# Altium PCB PCB1.PcbDoc
Units mm, origin at the board's own origin, x right, y up, seen from the top; angles counter-clockwise.
Board outline 105.28 x 80.03 mm, 2 copper layers (Top Layer, Bottom Layer); 35 components, 35 nets, 96 pads, 0 vias.
Unrouted connection lines stored in the file: 40.
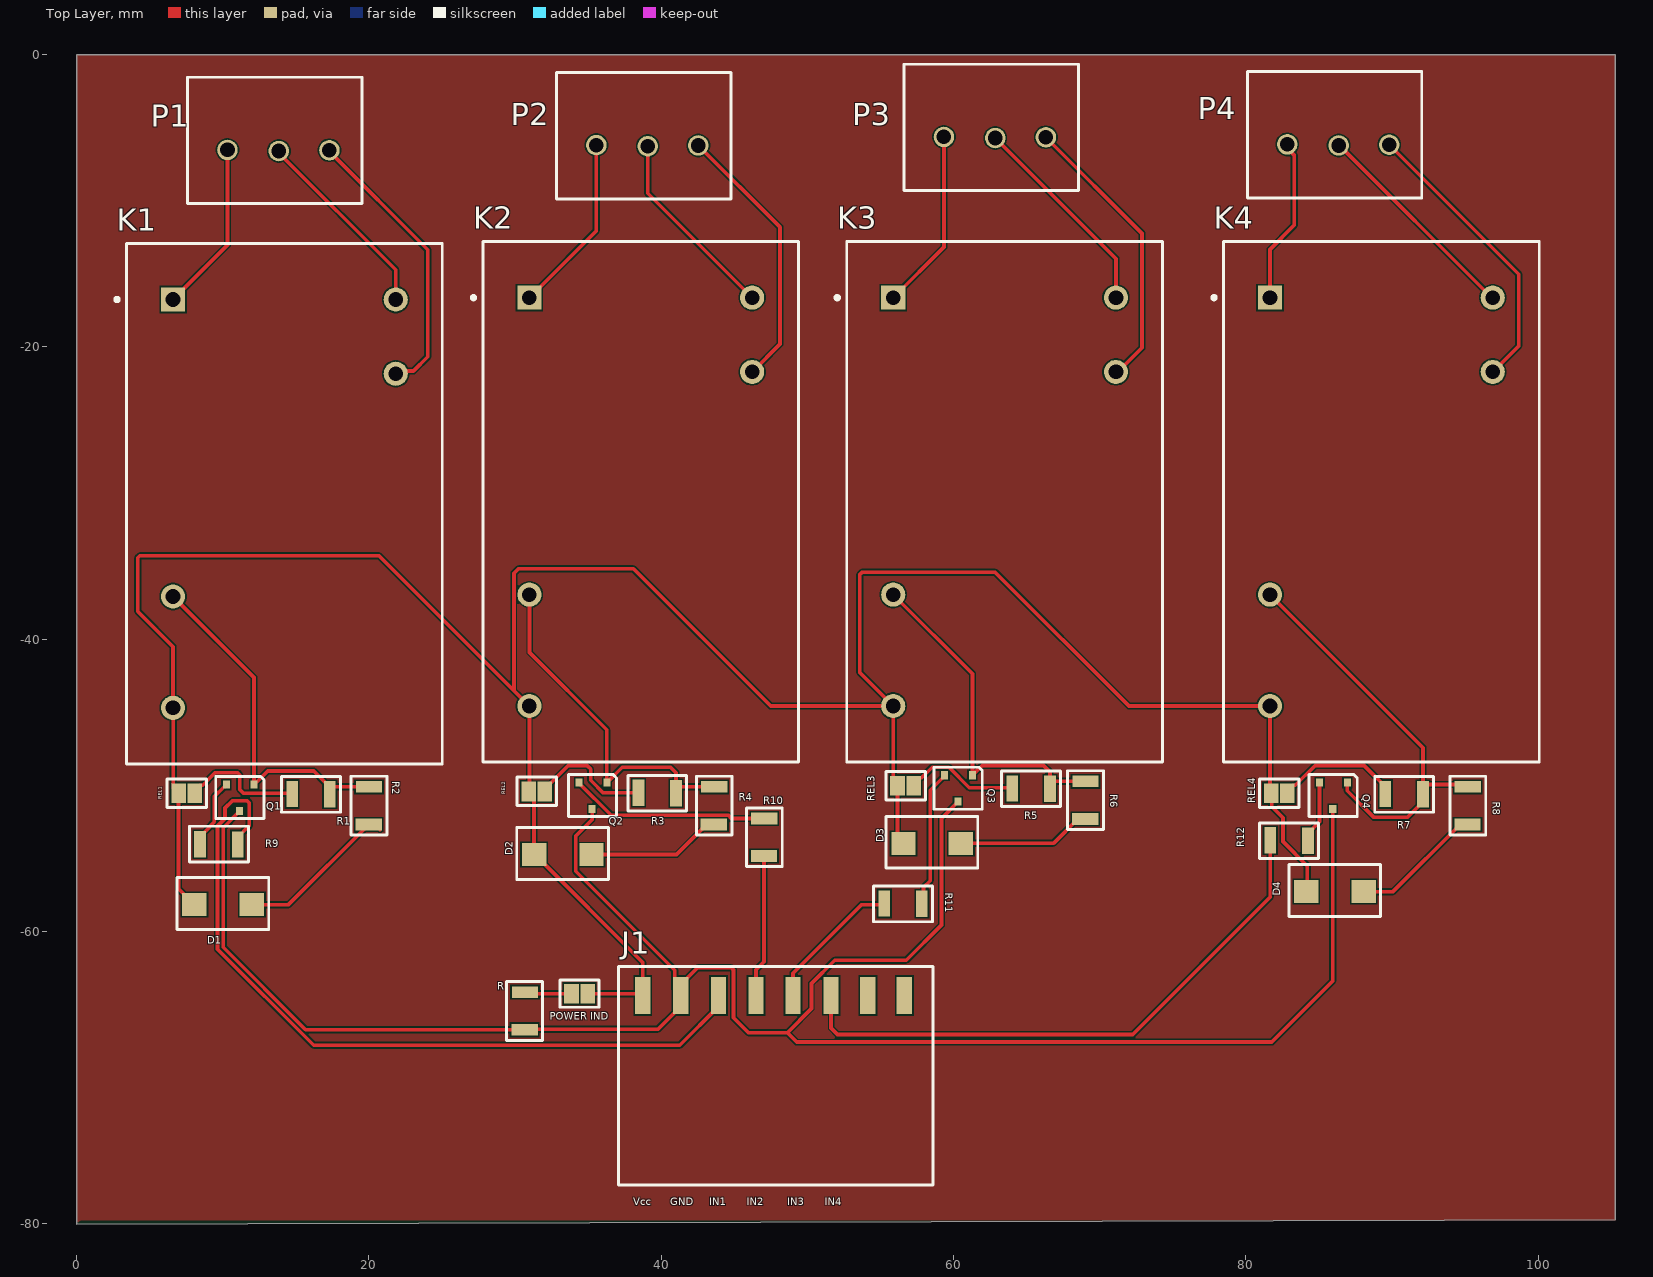
[diagram p0: Top Layer view]
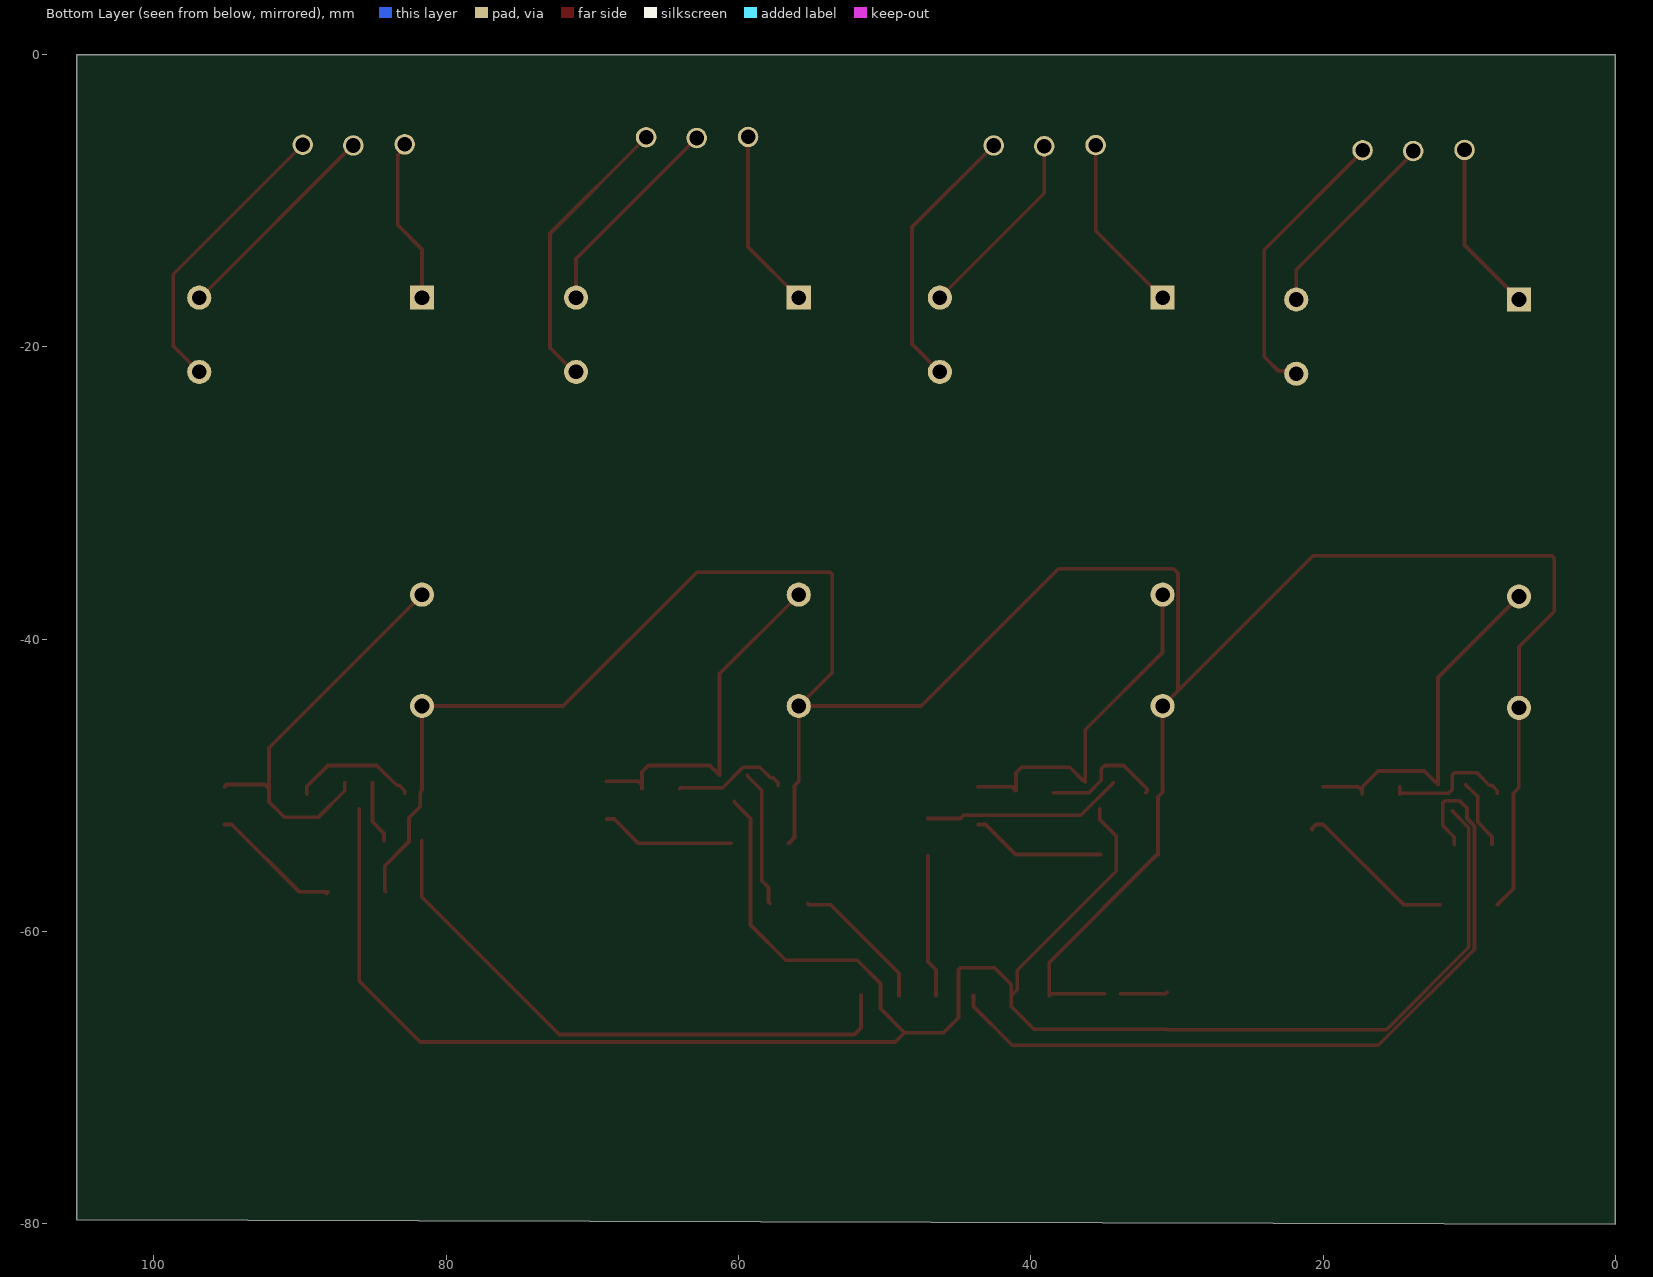
[diagram p1: Bottom Layer view, seen from below]
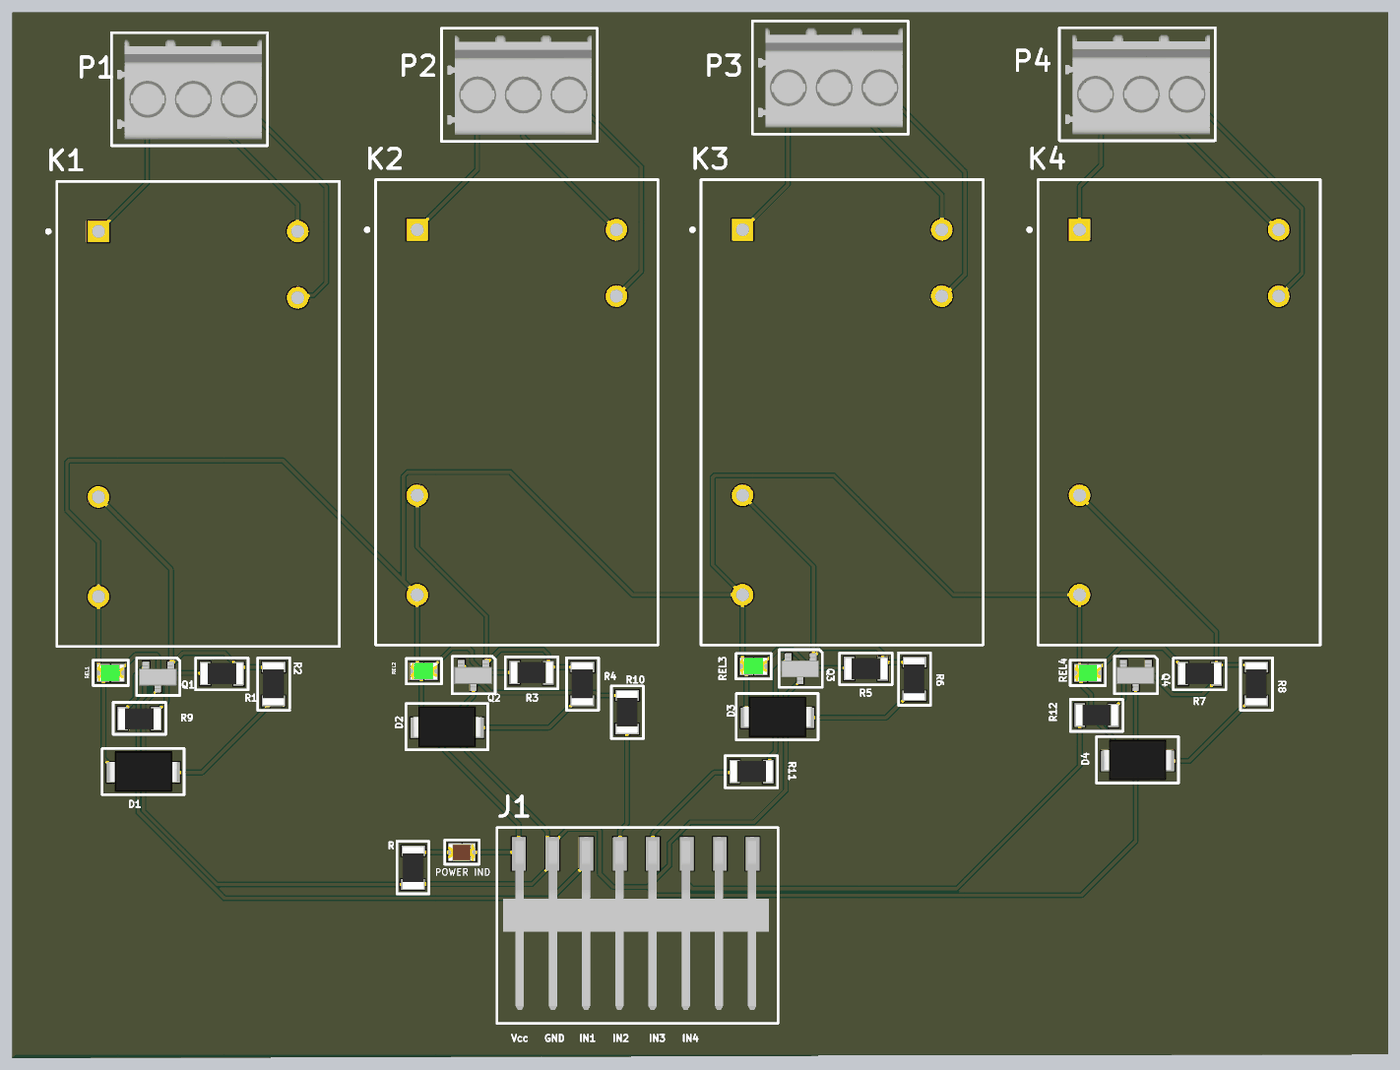
[diagram p2: 3D render of the assembled board from above, using the file's embedded part models]

## Layer stack, top to bottom
Top Solder: solder mask 0.0102, Solder Resist, Dk 3.5
Top Layer: signal copper 0.0356
Dielectric 1: dielectric 0.32, FR-4, Dk 4.8
Bottom Layer: signal copper 0.0356
Bottom Solder: solder mask 0.0102, Solder Resist, Dk 3.5

## Board outline
105.283,0 105.283,-79.738 0,-80.026 0,0

## Design rules (kind name [scope] priority, off if disabled: settings)
Clearance [All] p1: gap=0.1 ignorepadtopadclearanceinfootprint=FALSE
PolygonConnect [All] p1: connectstyle=Relief reliefconductorwidth=0.254 reliefentries=4 polygonreliefangle="90 Angle" airgapwidth=0.254
RoutingVias [All] p1: holewidth=0.711 width=1.27 viastyle="Through Hole" minholewidth=0.711 minwidth=1.27 maxholewidth=0.711 maxwidth=1.27
SolderMaskExpansion [All] p1: expansion=0.102 istentingtop=FALSE
Width [All] p1: maxlimit=0.254 minlimit=0.254 preferedwidth=0.254
30 further rules are at their usual default settings.

## Components (designator, comment, footprint, x,y, rotation, side; value= is the part's Value field where it differs from the comment)
D1 "Diode" Diode-1N4007 10.033,-58.166 r180 top
D2 "Diode" Diode-1N4007 33.274,-54.737 r180 top
D3 "Diode" Diode-1N4007 58.547,-53.975 r180 top
D4 "Diode" Diode-1N4007 86.106,-57.277 r180 top
J1 "6X1 header" "6X1 pin header - duplicate" 51.697,-64.389 r270 top
K1 "Relay" MODULE5B 14.224,-30.734 r270 top
K2 "Relay" MODULE5B 38.608,-30.607 r270 top
K3 "Relay" MODULE5B 63.5,-30.607 r270 top
K4 "Relay" MODULE5B 89.281,-30.607 r270 top
P1 "through hole screw terminal" "3X1 screw terminal" 11.303,-6.604 r90 top
P2 "through hole screw terminal" "3X1 screw terminal" 36.545,-6.273 r90 top
P3 "through hole screw terminal" "3X1 screw terminal" 60.325,-5.715 r90 top
P4 "through hole screw terminal" "3X1 screw terminal" 83.82,-6.223 r90 top
"POWER IND" "LED_RED_SMD" "LSM0805 Series green" 34.417,-64.262 r180 top
Q1 "Q1" "transistor BC547 RCC1206 e3" 11.176,-50.8 r270 top
Q2 "Q2" "transistor BC547 RCC1206 e3" 35.306,-50.673 r270 top
Q3 "Q1" "transistor BC547 RCC1206 e3" 60.325,-50.165 r270 top
Q4 "Q1" "transistor BC547 RCC1206 e3" 85.979,-50.673 r270 top
R "resistor" "Resistor-RCC1206 e3" 30.734,-65.405 r270 top
R1 "resistor" "Resistor-RCC1206 e3" 16.002,-50.546 r0 top
R2 "resistor" "Resistor-RCC1206 e3" 19.939,-51.435 r90 top
R3 "resistor" "Resistor-RCC1206 e3" 39.696,-50.471 r0 top
R4 "resistor" "Resistor-RCC1206 e3" 43.561,-51.435 r90 top
R5 "resistor" "Resistor-RCC1206 e3" 65.278,-50.165 r0 top
R6 "resistor" "Resistor-RCC1206 e3" 68.961,-51.054 r90 top
R7 "resistor" "Resistor-RCC1206 e3" 90.805,-50.546 r0 top
R8 "resistor" "Resistor-RCC1206 e3" 95.123,-51.435 r90 top
R9 "resistor" "Resistor-RCC1206 e3" 9.779,-54.102 r180 top
R10 "resistor" "Resistor-RCC1206 e3" 46.99,-53.594 r90 top
R11 "resistor" "Resistor-RCC1206 e3" 56.515,-58.039 r0 top
R12 "resistor" "Resistor-RCC1206 e3" 82.931,-53.721 r0 top
REL1 "LED_GREEN_SMD" LSM0805452V-Green 7.535,-50.546 r0 top
REL2 "LED_GREEN_SMD" LSM0805452V-Green 31.496,-50.419 r0 top
REL3 "LED_GREEN_SMD" LSM0805452V-Green 56.727,-50.038 r0 top
REL4 "LED_GREEN_SMD" LSM0805452V-Green 82.296,-50.546 r0 top

## Footprints (in the part's own frame and the unit in brackets; to place one, negate y for a bottom-side part, rotate by r counter-clockwise, add the part's x,y. Pads: shape width x height; smd on the part's side, far side on the other; paste and mask are expansions set on the pad)
"3X1 screw terminal" [mm]
  round 1.4 hole 1: 1(0.075,0.975) 2(0,-2.54) 3(0.05,-6)
  silkscreen extent -3.6,-8.23 5.05,3.7, body extent -3.1,-7.81 4.5,3.26, height 9.01
"6X1 pin header - duplicate" [mm]
  rect 2.55x1.05 smd: 1(0,4.95) 2(0,2.45) 3(0,-0.075) 4(0,-2.675) 5(0,-5.2) 6(0,-7.77) 7(0,-10.36) 8(0,-12.95)
  silkscreen extent -2,-14.6 12.98,6.9, body extent -1.29,-14.14 11.95,6.18, height 3.47
Diode-1N4007 [mm]
  rect 1.67x1.56 smd: A(-1.965,0) K(1.965,0)
  silkscreen extent -3.12,-1.85 3.15,1.7, body extent -2.65,-1.63 2.65,1.48, height 2.41
"LSM0805 Series green" [mm]
  rect 1x1.35 smd: A(-0.55,0) K(0.55,0)
  silkscreen extent -1.33,-0.92 1.33,0.93, body extent -0.97,-0.6 1.02,0.65, height 1.11
LSM0805452V-Green [mm]
  rect 1x1.35 smd: A(-0.55,0) K(0.55,0)
  silkscreen extent -1.35,-0.97 1.35,0.97, body extent -1,-0.62 1,0.62, height 1.11
MODULE5B [mm] "DIP; 5 Round Pins; Row Space 15.24 mm; Pitch 2.54 mm"
  rect 1.65x1.65 hole 1: 1(-13.97,-7.62)
  round 1.65 hole 1: 2(-13.97,7.62) 3(-8.89,7.62) 4(13.97,-7.62) 5(6.35,-7.62)
  silkscreen extent -17.8,-11.57 17.8,10.8, body extent -17.8,-10.8 17.8,10.8, height 14
"Resistor-RCC1206 e3" [mm]
  rect 0.8x1.8 smd: 1(-1.25,-0.05) 2(1.325,-0.075)
  silkscreen extent -1.98,-1.3 2.05,1.15, body extent -1.55,-0.85 1.65,0.75, height 0.56
"transistor BC547 RCC1206 e3" [mm]
  rect 0.55x0.48 smd: 1(-0.85,0.975) 2(-0.85,-0.925) 3(0.95,-0.025)
  silkscreen extent -1.4,-1.65 1.48,1.65, body extent -1.09,-1.5 1.24,1.42, height 0.94

## Part data
K1 K2 K3 K4: "SPDT Relay", LatestRevisionDate=17-Jul-2002, LatestRevisionNote="Re-released for DXP Platform.", PackageReference=MODULE5B, Published=8-Jun-2000, Publisher="Altium Limited"
Q1 Q2 Q3 Q4: library part BC547_SMD

## Nets (pads, with @x,y where several pads share a name; then routed paths per layer and width w, separated by ;. In a path a pad name is that pad's centre, name@x,y a point inside that pad or via, vN(x,y) a via of type N, cw(c..) or ccw(c..) an arc to the next point about the centre after c; other vN are vias at no path point)
5V: "POWER IND.A" D1.K D2.K D3.K D4.K J1.8 K1.4 K2.4 K3.4 K4.4 REL1.A REL2.A REL3.A REL4.A | length 186.7
  Top Layer w0.254: D1.K 6.985,-57.083 REL1.A 6.612,-50.173 6.612,-44.712 K1.4 6.604,-40.515 4.191,-38.102 4.191,-34.439 4.34,-34.29 20.701,-34.29 29.936,-43.525 ; 34.967,-64.262 38.62,-64.262 J1.8 38.747,-62.12 31.364,-54.737 D2.K 31.309,-50.782 REL2.A 30.988,-50.377 K2.4 29.936,-43.525 ; D3.K 56.177,-53.57 REL3.A 55.88,-49.741 K3.4 ; D4.K 84.201,-57.217 84.201,-55.499 82.55,-53.848 82.55,-52.217 81.786,-51.453 81.786,-50.586 REL4.A 81.746,-50.371 81.661,-50.286 K4.4 72.011,-44.577 62.867,-35.433 53.743,-35.433 53.594,-35.582 53.594,-42.291 K3.4 ; 29.936,-43.525 29.936,-35.491 30.248,-35.179 38.102,-35.179 47.5,-44.577 K3.4
GND: J1.7 Q1.3 Q2.3 Q3.3 Q4.3 R.2 | length 147.9
  Top Layer w0.254: Q1.3 11.151,-51.785 10.033,-52.903 10.033,-61.087 15.676,-66.73 R.2 30.687,-66.702 39.774,-66.702 41.337,-65.139 J1.7 ; Q2.3 35.281,-52.349 34.163,-53.467 34.163,-55.88 40.939,-62.656 40.939,-63.991 J1.7 ; Q3.3 60.3,-51.15 59.182,-52.268 59.182,-59.563 56.769,-61.976 51.879,-61.976 50.292,-63.563 50.292,-65.278 48.641,-66.929 ; Q4.3 85.954,-63.398 81.788,-67.564 49.276,-67.564 48.641,-66.929 ; J1.7 41.337,-63.639 42.492,-62.484 44.809,-62.484 44.958,-62.633 44.958,-65.913 45.974,-66.929 48.641,-66.929
IN1: J1.6 R9.1 | length 53.8
  Top Layer w0.254: R9.1 11.029,-53.552 11.811,-52.77 11.811,-51.203 11.662,-51.054 10.668,-51.054 10.16,-51.562 10.16,-52.275 9.652,-52.783 9.652,-61.214 16.229,-67.791 41.275,-67.791 43.927,-65.139 J1.6
IN2: J1.5 R10.1 | length 9.8
  Top Layer w0.254: J1.5 46.497,-62.624 47.04,-62.081 R10.1
IN3: J1.4 R11.1 | length 9.7
  Top Layer w0.254: J1.4 49.022,-62.865 53.721,-58.166 55.188,-58.166 R11.1
IN4: J1.3 R12.1 | length 40.2
  Top Layer w0.254: J1.3 51.622,-66.615 52.063,-67.056 72.263,-67.056 81.681,-57.638 R12.1
NetD1_A: D1.A R2.1 | length 11.2
  Top Layer w0.254: D1.A 14.508,-58.166 R2.1 20.489,-52.685 20.762,-52.958 R2.1@20.762,-53.025
NetD2_A: D2.A R4.1 | length 9.2
  Top Layer w0.254: D2.A 41.059,-54.737 43.111,-52.685 R4.1
NetD3_A: D3.A R6.1 | length 9.2
  Top Layer w0.254: D3.A 66.84,-53.975 68.511,-52.304 R6.1
NetD4_A: D4.A R8.1 | length 9.2
  Top Layer w0.254: D4.A@88.198,-57.404 D4.A 90.081,-57.277 94.673,-52.685 R8.1
NetK1_1: K1.1 P1.1 | length 11.8
  Top Layer w0.254: K1.1 10.328,-13.04 P1.1
NetK1_2: K1.2 P1.2 | length 13.5
  Top Layer w0.254: P1.2 13.843,-6.731 21.844,-14.732 K1.2
NetK1_3: K1.3 P1.3 | length 19.6
  Top Layer w0.254: P1.3 17.303,-6.635 24.025,-13.357 24.025,-20.679 23.05,-21.654 22.034,-21.654 K1.3
NetK1_5: K1.5 Q1.1 R1.2 R2.2 | length 24.6
  Top Layer w0.254: K1.5@6.604,-37.338 K1.5 12.151,-42.631 Q1.1 ; Q1.1@12.264,-49.802 12.299,-49.802 13.079,-49.022 16.228,-49.022 17.327,-50.121 R1.2@17.327,-50.383 ; R1.2 R1.2@17.327,-50.383 ; R2.2 17.6,-50.11 R1.2@17.327,-50.383
NetK2_1: K2.1 P2.1 | length 12.3
  Top Layer w0.254: K2.1 35.57,-12.055 P2.1
NetK2_2: K2.2 P2.2 | length 13.3
  Top Layer w0.254: P2.2 39.085,-9.494 K2.2
NetK2_3: K2.3 P2.3 | length 18.6
  Top Layer w0.254: P2.3 48.133,-11.811 48.133,-19.812 K2.3
NetK2_5: K2.5 Q2.1 R3.2 R4.2 | length 24.1
  Top Layer w0.254: K2.5 30.988,-40.915 36.281,-46.208 Q2.1@36.281,-49.788 ; Q2.1@36.429,-49.675 37.336,-48.768 40.64,-48.768 41.021,-49.149 41.021,-50.383 41.294,-50.11 R4.2
NetK3_1: K3.1 P3.1 | length 12.4
  Top Layer w0.254: K3.1 59.35,-13.167 P3.1
NetK3_2: K3.2 P3.2 | length 14.3
  Top Layer w0.254: P3.2 71.12,-13.97 K3.2
NetK3_3: K3.3 P3.3 | length 19.6
  Top Layer w0.254: P3.3 72.898,-12.238 72.898,-20.066 71.247,-21.717 K3.3
NetK3_5: K3.5 Q3.1 R5.2 R6.2 | length 23.9
  Top Layer w0.254: K3.5 61.3,-42.377 Q3.1 ; Q3.1@61.413,-49.167 61.448,-49.167 61.974,-48.641 66.167,-48.641 66.603,-49.077 R5.2@66.603,-50.002 ; R5.2 R5.2@66.603,-50.002 ; R6.2 66.876,-49.729 R5.2@66.603,-50.002
NetK4_1: K4.1 P4.1 | length 11.4
  Top Layer w0.254: K4.1 81.661,-13.335 83.312,-11.684 83.312,-6.87 82.845,-6.403 P4.1
NetK4_2: K4.2 P4.2 | length 14.9
  Top Layer w0.254: P4.2 86.423,-6.223 96.837,-16.637 K4.2
NetK4_3: K4.3 P4.3 | length 19.9
  Top Layer w0.254: P4.3 98.679,-15.032 98.679,-19.939 K4.3
NetK4_5: K4.5 Q4.1 R7.2 R8.2 | length 28.7
  Top Layer w0.254: K4.5 92.13,-47.426 R7.2@92.13,-50.215 ; Q4.1 86.954,-50.378 88.773,-52.197 91.054,-52.197 92.13,-51.121 R7.2 R7.2@92.13,-50.215 ; R8.2 95.03,-49.942 92.403,-49.942 R7.2@92.13,-50.215
"NetPOWER IND_K": "POWER IND.K" R.1 | length 3.2
  Top Layer w0.254: R.1 30.791,-64.262 33.867,-64.262
NetQ1_2: Q1.2 R9.2 | length 4.8
  Top Layer w0.254: R9.2 8.454,-53.527 9.086,-52.895 9.086,-52.849 9.429,-52.506 9.429,-50.772 10.103,-50.098 10.138,-50.098 10.251,-49.985 Q1.2
NetQ2_2: Q2.2 R10.2 | length 13.7
  Top Layer w0.254: Q2.2 34.381,-49.858 36.581,-52.058 44.605,-52.058 44.816,-52.269 R10.2
NetQ3_2: Q3.2 R11.2 | length 9.4
  Top Layer w0.254: R11.2 57.953,-58.001 57.953,-56.982 58.409,-56.526 58.409,-50.341 59.4,-49.35 Q3.2
NetQ4_2: Q4.2 R12.2 | length 4.3
  Top Layer w0.254: R12.2 84.256,-53.296 85.054,-52.498 Q4.2
NetR1_1: R1.1 REL1.K | length 9
  Top Layer w0.254: REL1.K 8.085,-50.371 8.458,-49.998 8.633,-49.998 9.482,-49.149 11.027,-49.149 11.176,-49.298 11.176,-50.292 11.43,-50.546 14.702,-50.546 R1.1 R1.1@14.752,-50.096
NetR3_1: R3.1 REL2.K | length 8.6
  Top Layer w0.254: REL2.K@32.148,-50.521 REL2.K 32.046,-50.244 33.649,-48.641 34.925,-48.641 35.179,-48.895 35.179,-49.657 36.043,-50.521 R3.1
NetR5_1: R5.1 REL3.K | length 8
  Top Layer w0.254: REL3.K 57.277,-49.863 57.65,-49.49 57.825,-49.49 58.547,-48.768 59.69,-48.768 61.087,-50.165 63.978,-50.165 R5.1
NetR7_1: R7.1 REL4.K | length 8.7
  Top Layer w0.254: REL4.K 82.846,-50.371 83.219,-49.998 83.394,-49.998 84.751,-48.641 88.1,-48.641 89.555,-50.096 R7.1
pads on no net: J1.1 J1.2

## Polygon pours and split planes (outlines as drawn)
no net on Top Layer "NONET_L01_P000" (solid, pour order 0): 0,0 0,-80.025 0.275,-79.75 105.3,-79.75 105.3,0

## Silkscreen, mask and mechanical layers (free items; w line width, h text height)
Top Overlay:
  text "Vcc" at 38.1,-78.74 h0.51
  text "GND" at 40.64,-78.74 h0.51
  text "IN1" at 43.307,-78.74 h0.51
  text "IN2" at 45.847,-78.74 h0.51
  text "IN3" at 48.641,-78.74 h0.51
  text "IN4" at 51.181,-78.74 h0.51